# Altium PCB OneWireTC.PcbDoc
Units mil, origin at the board's own origin, x right, y up, seen from the top; angles counter-clockwise.
Board outline 21889.76 x 818.11 mil, 2 copper layers (Top Layer, Bottom Layer); 57 components, 37 nets, 268 pads, 163 vias.
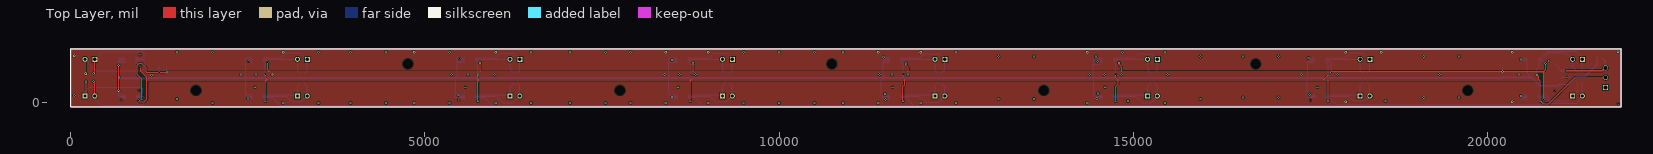
[diagram p0: Top Layer view]
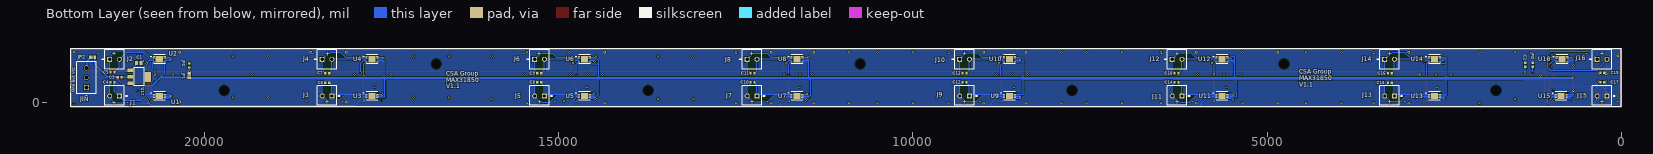
[diagram p1: Bottom Layer view, seen from below]

## Layer stack, top to bottom
Top Solder: solder mask 0.4, Solder Resist, Dk 3.5
Top Layer: signal copper 1.4
Dielectric 1: dielectric 12.6, FR-4, Dk 4.8
Bottom Layer: signal copper 1.4
Bottom Solder: solder mask 0.4, Solder Resist, Dk 3.5

## Board outline
0,-59.06 21889.76,-59.06 21889.76,759.06 0,759.06

## Design rules (kind name [scope] priority, off if disabled: settings)
Clearance [All] p1: gap=10 ignorepadtopadclearanceinfootprint=FALSE except(0: Arc-Hole Track-Hole SMDPad-Hole THPad-Hole Via-Hole Fill-Hole Poly-Hole Region-Hole Text-Hole; 8: Arc-Arc Arc-Track Arc-SMDPad Arc-Via Track-Track Track-SMDPad Track-Via SMDPad-SMDPad)
PolygonConnect [All] p1: connectstyle=Relief reliefconductorwidth=10 reliefentries=4 polygonreliefangle="90 Angle" airgapwidth=10
RoutingVias [All] p1: holewidth=28 width=50 viastyle="Through Hole" minholewidth=10 minwidth=25 maxholewidth=28 maxwidth=50
SolderMaskExpansion [All] p1: expansion=4 istentingtop=FALSE
Width [All] p1: maxlimit=40 minlimit=10 preferedwidth=10 minimp=50.000000 maximp=50.000000 favimp=50.000000
30 further rules are at their usual default settings.

## Classes and differential pairs
component class Sheet2: C12 C13 C14 C15 C16 C17 C18 C19 J9 J10 J11 J12 J13 J14 J15 J16 U9 U10 U11 U12 U13 U14 U15 U16
component class Sheet1: C1 C2 C3 C4 C5 C6 C7 C8 C9 C10 C11 J1 J2 J3 J4 J5 J6 J7 J8 JIN JP0 JP1 JP2 JPO U1 U2 U3 U4 U5 U6 U7 U8 U17

## Components (designator, comment, footprint, x,y, rotation, side; value= is the part's Value field where it differs from the comment)
C1 "" C0805 20929.13,559.06 r0 bottom value=4.7uF
C2 "" 1608[0603] 1358.27,531.5 r270 bottom value=0.1uF
C3 "" 1608[0603] 21198.06,353.15 r0 bottom value=1uF
C4 "" 1608[0603] 21299.21,285.43 r0 bottom value=0.1uF
C5 "" 1608[0603] 21299.21,423.23 r180 bottom value=0.1uF
C6 "" 1608[0603] 18267.72,279.53 r0 bottom value=0.1uF
C7 "" 1608[0603] 18267.72,413.39 r180 bottom value=0.1uF
C8 "" 1608[0603] 15275.59,283.46 r0 bottom value=0.1uF
C9 "" 1608[0603] 15275.59,413.39 r180 bottom value=0.1uF
C10 "" 1608[0603] 12263.78,283.46 r0 bottom value=0.1uF
C11 "" 1608[0603] 12263.78,413.39 r180 bottom value=0.1uF
C12 "" 1608[0603] 9271.65,283.46 r0 bottom value=0.1uF
C13 "" 1608[0603] 9271.65,413.39 r180 bottom value=0.1uF
C14 "" 1608[0603] 6279.53,283.46 r0 bottom value=0.1uF
C15 "" 1608[0603] 3267.72,275.59 r0 bottom value=0.1uF
C16 "" 1608[0603] 3267.72,413.39 r180 bottom value=0.1uF
C17 "" 1608[0603] 267.72,283.46 r0 bottom value=0.1uF
C18 "" 1608[0603] 6279.53,413.39 r180 bottom value=0.1uF
C19 "" 1608[0603] 267.72,417.32 r180 bottom value=0.1uF
J1 "1776275-2" TE_1776275-2 21202.2,90.94 r0 bottom
J2 "1776275-2" TE_1776275-2 21339.8,609.05 r180 bottom
J3 "1776275-2" TE_1776275-2 18202.2,90.94 r0 bottom
J4 "1776275-2" TE_1776275-2 18339.8,609.05 r180 bottom
J5 "1776275-2" TE_1776275-2 15202.2,90.94 r0 bottom
J6 "1776275-2" TE_1776275-2 15339.8,609.05 r180 bottom
J7 "1776275-2" TE_1776275-2 12202.2,90.94 r0 bottom
J8 "1776275-2" TE_1776275-2 12339.8,609.05 r180 bottom
J9 "1776275-2" TE_1776275-2 9202.2,90.94 r0 bottom
J10 "1776275-2" TE_1776275-2 9339.8,609.05 r180 bottom
J11 "1776275-2" TE_1776275-2 6202.2,90.94 r0 bottom
J12 "1776275-2" TE_1776275-2 6339.8,609.05 r180 bottom
J13 "1776275-2" TE_1776275-2 3202.2,90.94 r0 bottom
J14 "1776275-2" TE_1776275-2 3339.8,609.05 r180 bottom
J15 "1776275-2" TE_1776275-2 202.2,90.94 r0 bottom
J16 "1776275-2" TE_1776275-2 339.8,609.05 r180 bottom
JIN "1776275-3" TE_1776275-3 21667.67,212.2 r90 bottom
JP0 "JPX" 1608[0603] 20213.81,522.44 r270 bottom
JP1 "JPY" 6-0805_L 20213.81,380.71 r270 bottom
JP2 "Jumper" 6-0805_L 21581.89,636.61 r0 bottom
JPO "JPX" 1608[0603] 1250,531.5 r270 bottom
U1 "MAX31850JATB" SON50P300X400X80-11N 20637.8,90.94 r180 bottom
U2 "MAX31850JATB" SON50P300X400X80-11N 20637.8,609.05 r180 bottom
U3 "MAX31850JATB" SON50P300X400X80-11N 17637.8,90.94 r180 bottom
U4 "MAX31850JATB" SON50P300X400X80-11N 17637.8,609.05 r180 bottom
U5 "MAX31850JATB" SON50P300X400X80-11N 14637.8,90.94 r180 bottom
U6 "MAX31850JATB" SON50P300X400X80-11N 14637.8,609.05 r180 bottom
U7 "MAX31850JATB" SON50P300X400X80-11N 11637.8,90.94 r180 bottom
U8 "MAX31850JATB" SON50P300X400X80-11N 11637.8,609.05 r180 bottom
U9 "MAX31850JATB" SON50P300X400X80-11N 8637.8,90.94 r180 bottom
U10 "MAX31850JATB" SON50P300X400X80-11N 8637.8,609.05 r180 bottom
U11 "MAX31850JATB" SON50P300X400X80-11N 5637.8,90.94 r180 bottom
U12 "MAX31850JATB" SON50P300X400X80-11N 5637.8,609.05 r180 bottom
U13 "MAX31850JATB" SON50P300X400X80-11N 2637.8,90.94 r180 bottom
U14 "MAX31850JATB" SON50P300X400X80-11N 2637.8,609.05 r180 bottom
U15 "MAX31850JATB" SON50P300X400X80-11N 850,90.94 r180 bottom
U16 "MAX31850JATB" SON50P300X400X80-11N 837.8,609.05 r180 bottom
U17 "MCP1799-3302H/DB" SOT230P700X180-4N 20923.42,361.54 r270 bottom

## Footprints (in the part's own frame and the unit in brackets; to place one, negate y for a bottom-side part, rotate by r counter-clockwise, add the part's x,y. Pads: shape width x height; smd on the part's side, far side on the other; paste and mask are expansions set on the pad)
6-0805_L [mm] "Chip Resistor, Body 2.0x1.2mm, IPC High Density"
  rect 1x1.3 smd: 1(-0.8,0) 2(0.8,0)
  silkscreen extent 0,-0.55 0,0.55, body extent -1.07,-0.7 1.07,0.7, height 0.7
1608[0603] [mm] "Chip Capacitor, Body 1.6x0.8mm, IPC High Density"
  rect 0.8x0.9 smd: 1(-0.7,0) 2(0.7,0)
  body extent -0.87,-0.48 0.87,0.48, height 1.3
C0805 [mm] "Chip Capacitor, Body 2.0x1.3mm, IPC High Density"
  rect 1.1x1.4 smd: 1(-0.75,0) 2(0.75,0)
  body extent -1.1,-0.72 1.1,0.72, height 1.4
SON50P300X400X80-11N [mm]
  rrect25% 0.86x0.27 smd: 1(-1.935,1) 2(-1.935,0.5) 3(-1.935,0) 4(-1.935,-0.5) 5(-1.935,-1) 6(1.935,-1) 7(1.935,-0.5) 8(1.935,0) 9(1.935,0.5) 10(1.935,1)
  rect 2.6x2.3 smd paste-2: 11(0,0)
  silkscreen extent -3.1,-1.55 2.05,1.55
SOT230P700X180-4N [mil]
  rect 48x88 smd: 1(-91,-122) 2(0,-122) 3(91,-122)
  rect 141.73x86.61 smd: 4(0,122.01)
  silkscreen extent -129,-70 129,70
TE_1776275-2 [mm]
  rect 1.8x1.8 hole 1.2: 1(0,0)
  round 1.8 hole 1.2: 2(3.5,0)
  silkscreen extent -2.74,-3.6 5.25,3.4, body extent -2.29,-3.39 5.71,3.61, height 8.5
TE_1776275-3 [mm]
  rect 1.75x1.75 hole 1.4: 1(0,0)
  round 1.75 hole 1.4: 2(3.5,0) 3(7,0)
  silkscreen extent -3,-3.6 9.25,3.4, body extent -2.19,-3.36 9.31,3.64, height 8.4

## Part data
C1 C2 C3 C4 C5 C6 C7 C8 C9 C10 C11 C12 C13 C14 C15 C16 C17 C18 C19: library part "Cap Semi", "Capacitor (Semiconductor SIM Model)", LatestRevisionDate=29-May-2009, LatestRevisionNote="IPC-7351 Footprint Added.", PackageDescription="Chip Capacitor", PackageReference=C1206, Published=8-Jun-2000, Publisher="Altium Limited"
J1 J2 J3 J4 J5 J6 J7 J8 J9 J10 J11 J12 J13 J14 J15 J16: "TERM BLOCK 2POS SIDE ENT 3.5MM", Package=None, Availability=Unavailable, MF="{'manufacturer': u'TE Connectivity'}", MP=1776275-2, Price=None
JIN: Package=None, Availability=Unavailable, MF="{'manufacturer': u'TE Connectivity'}", MP=1776275-3, Price=None
JP0 JP1 JPO: library part Jumper, "Jumper Wire", LatestRevisionDate=17-Jul-2002, LatestRevisionNote="Re-released for DXP Platform.", PackageDescription="Radial Cap, Thru-Hole; 2 Leads; 0.2 in Pin Spacing", PackageReference=RAD-0.2, Published=24-Mar-1999, Publisher="Altium Limited"
JP2: "Jumper Wire", LatestRevisionDate=17-Jul-2002, LatestRevisionNote="Re-released for DXP Platform.", PackageDescription="Radial Cap, Thru-Hole; 2 Leads; 0.2 in Pin Spacing", PackageReference=RAD-0.2, Published=24-Mar-1999, Publisher="Altium Limited"
U1 U2 U3 U4 U5 U6 U7 U8 U9 U10 U11 U12 U13 U14 U15 U16: "None", Availability=Unavailable, MF="{'manufacturer': u'Maxim Integrated'}", MP=MAX31850JATB, Package=None, Price=None
U17: library part AP2114H-3.3TRG1, Package=None, Availability=Unavailable, MF="{'manufacturer': u'Diodes Inc.'}", MP=AP2114H-3.3TRG1, Price=None

## Free pads (board coordinates)
  round 0 hole 137.8: 2(1768.9,169.68) 2(4761.02,543.7) 2(7753.15,169.68) 2(10745.28,543.7) 2(13737.4,169.68) 2(16729.53,543.7) 2(19721.65,169.68)

## Via types
v1: diameter 30, hole 15.75, Top Layer to Bottom Layer, tented both sides, 118 vias
v2: diameter 25, hole 15.75, Top Layer to Bottom Layer, tented both sides, 45 vias

## Nets (pads, with @x,y where several pads share a name; then routed paths per layer and width w, separated by ;. In a path a pad name is that pad's centre, name@x,y a point inside that pad or via, vN(x,y) a via of type N, cw(c..) or ccw(c..) an arc to the next point about the centre after c; other vN are vias at no path point)
BUS: JIN.2 U1.5 U2.5 U3.5 U4.5 U5.5 U6.5 U7.5 U8.5 U9.5 U10.5 U11.5 U12.5 U13.5 U14.5 U15.5 U16.5 | length 25863.5
  Top Layer w10: v2(989.4,502.76) 989.4,439.35 1075.61,353.15 ; v2(5749.24,396.02) 5749.24,337.4 5768.93,317.72 ; v2(8749.24,18.09) 8749.24,298.03 8768.93,317.72 ; v2(14749.24,18.09) 14749.24,223.23 14784.68,258.66 14784.68,317.72
  Top Layer w12: v2(959.87,28.35) 981.53,6.69 1040.58,6.69 1075.61,41.72 1075.61,317.72 1075.61,353.15
  Top Layer w14: 1075.61,317.72 2776.8,317.72 ; v2(2749.24,18.09) 2749.24,290.16 2776.8,317.72 ; v2(2749.24,392.52) 2749.24,345.28 2776.8,317.72 ; v2(5749.24,18.09) 5749.24,298.03 5768.93,317.72 ; v2(8759.84,383.86) 8759.84,326.8 8768.93,317.72 ; v2(11749.24,18.09) 11749.24,227.17 11771.65,249.57 11771.65,314.96 ; v2(11753.18,392.52) 11753.18,345.28 11776.2,322.26 11780.74,317.72 ; v2(14753.18,392.52) 14753.18,349.21 14784.68,317.72 ; v2(17749.24,18.09) 17751.35,20.2 17751.35,27.98 17751.97,28.6 17751.97,317.72 ; v2(17755.9,384.8) 17749.4,384.8 17682.31,317.72 ; 20725.62,317.72 17751.97,317.72 ; 2776.8,317.72 5768.93,317.72 ; 5768.93,317.72 8768.93,317.72 ; 8768.93,317.72 11771.65,317.72 11780.74,317.72 ; 11780.74,317.72 14784.68,317.72 ; 14784.68,317.72 17682.31,317.72 ; 17682.31,317.72 17751.97,317.72
  Top Layer w16: v2(20698.82,387.83) 20725.62,361.02 20725.62,317.72 20748.03,295.31 20748.03,19.31 v2(20749.24,18.09) 20784.27,-16.93 20866.99,-16.93 21233.92,350 JIN.2
  Bottom Layer w10: U16.5 925.59,569.68 925.91,569.37 925.91,566.25 v2(989.4,502.76) ; U15.5 937.8,51.57 959.87,29.5 v2(959.87,28.35) ; U13.5@2724.8,50 v2@2749.24,25.56 ; U14.5@2724.8,569.68 2749.24,545.24 v2(2749.24,392.52) ; U11.5@5724.8,50 v2@5749.24,25.56 ; U12.5@5724.8,565.75 5749.24,541.31 v2(5749.24,396.02) v2@5749.24,393.7 ; U10.5@8720.87,565.75 8759.84,526.77 v2(8759.84,383.86) ; U9.5@8724.8,50 v2@8749.24,25.56 ; U7.5@11724.8,50 v2@11749.24,25.56 ; U8.5@11724.8,565.75 11753.18,537.37 v2(11753.18,392.52) ; U5.5@14724.8,50 v2@14749.24,25.56 ; U6.5@14724.8,569.68 14753.18,541.31 v2(14753.18,392.52) ; U4.5 17725.59,569.68 17755.9,539.37 v2(17755.9,384.8) ; U3.5@17724.8,50 v2@17749.24,25.56 ; v2(20698.82,387.83) 20698.82,466.54 20729.46,497.18 20729.46,568.96 U2.5@20728.74,569.68 ; U1.5@20724.8,50 v2@20749.24,25.56
GND: C1.1 C2.1 C3.1 JIN.1 JP0.1 JPO.1 U1.1 U1.6 U1.7 U1.8 U1.9 U1.11 U2.1 U2.7 U2.8 U2.9 U2.11 U3.1 U3.6 U3.8 U3.9 U3.11 U4.1 U4.8 U4.9 U4.11 U5.1 U5.6 U5.7 U5.9 U5.11 U6.1 U6.7 U6.9 U6.11 U7.1 U7.6 U7.9 U7.11 U8.1 U8.9 U8.11 U9.1 U9.6 U9.7 U9.8 U9.11 U10.1 U10.7 U10.8 U10.11 U11.1 U11.6 U11.8 U11.11 U12.1 U12.8 U12.11 U13.1 U13.6 U13.7 U13.11 U14.1 U14.7 U14.11 U15.1 U15.6 U15.11 U16.1 U16.11 U17.2 | length 2770.9
  Bottom Layer w10: v2@715,45.94 722.56,45.94 728.19,51.57 U15.6 ; v2(2509,580.06) 2518.31,589.37 U14.7 ; U13.6 2512.43,51.57 2507.06,56.94 v2(2503,56.94) 2510,56.94 2524.31,71.26 U13.7 ; v2(5475,104.94) 5478,104.94 5492,90.94 U11.8 ; v2(5478,35.94) 5493.63,51.57 U11.6 ; v2(5489,617.05) 5496,617.05 5504,609.05 U12.8 ; v1@8477,73.44 8479.6,73.44 8482.59,76.43 8482.59,79.04 8494.5,90.94 U9.8 ; U9.6 8489.86,51.57 8478.82,62.61 8478.82,70.9 8479.18,71.26 U9.7 ; U10.7 8502.78,589.37 8492.1,600.05 8487,600.05 8487,602.05 8494,609.05 U10.8 ; v1@11476,638.05 11485.32,628.74 U8.9 ; v1@11493,120.94 11503.32,110.63 U7.9 ; v1@11505,43.94 11508.67,47.61 11546.04,47.61 11550,51.57 U7.6 ; v1@14475,647.05 14493.32,628.74 U6.9 ; v1@14493,579.06 14503.32,589.37 U6.7 ; v1@14502,124.94 14516.32,110.63 U5.9 ; U5.6 14495.78,51.57 14490.41,56.94 v1(14485,56.94) 14499.32,71.26 U5.7 ; v1@17475,633.74 v1(17475,628.58) ; v1@17488.39,115.32 v1(17488.39,110.16) ; U4.8@17561.54,608.98 17489.54,608.98 17475,623.52 v1(17475,628.58) ; U4.9 17475.16,628.74 v1(17475,628.58) ; U3.8@17574.92,90.55 17502.92,90.55 17488.39,105.09 v1(17488.39,110.16) ; U3.9@17575,110.32 17488.54,110.32 v1(17488.39,110.16) ; U1.9@20561.3,110.94 20490,110.94 20475,95.94 v1(20475,90.79) ; U1.7@20561.54,71.18 20489.54,71.18 v1@20478.83,81.9 ; U1.6 20490.86,51.57 20478.83,63.61 v1@20478.83,81.9 ; U1.8 20475.16,90.94 v1(20475,90.79) ; U2.7 20561.54,589.29 20489.54,589.29 20475,603.83 v1(20475,608.9) ; U2.8 20475.16,609.05 v1(20475,608.9) ; U2.9 20561.3,629.05 20490,629.05 20475,614.05 v1(20475,608.9) ; v2(20866.14,586.61) 20869.01,583.74 20874.92,583.74 20877.05,581.61 20882.95,581.61 20899.61,564.96 C1.1 ; C3.1@21164.09,357.6 C3.1@21168.54,353.15 ; v1(20475,90.79) 20478.83,86.96 v1@20478.83,81.9
  Bottom Layer w22: U17.2@21045.42,357.6 C3.1@21164.09,357.6
  other v1: 2000,-9.06 3000,-9.06 3500,-9.06 3950,-9.06 4450,-9.06 4850,-9.06 5350,-9.06 6000,-9.06 6500,-9.06 7050,-9.06 7550,-9.06 7900,-9.06 8400,-9.06 9000,-9.06 9500,-9.06 10000,-9.06 10500,-9.06 10900,-9.06 11400,-9.06 12000,-9.06 12500,-9.06 14350,-9.06 15450,-9.06 18000,10.63 20350,10.63 14926.41,18.5 18562.99,19.68 11504.84,43.79 1500,50 13100,50 13600,50 15950,50 16550,69.68 17050,69.68 19100,69.68 19600,69.68 8488.84,72.79 50,100 11492.84,120.79 14501.84,124.79 1141.73,383.86 2401.57,393.7 2618.11,393.7 2844.49,393.7 5374.02,393.7 5610.24,393.7 5984.25,393.7 8385.83,393.7 8592.52,393.7 8818.9,393.7 11417.32,393.7 11594.49,393.7 11820.87,393.7 14379.92,393.7 14596.46,393.7 14832.68,393.7 15482.28,393.7 17372.05,393.7 17883.86,393.7 19320.87,393.7 20442.91,393.7 14492.84,578.9 11475.84,637.9 14474.84,646.9 13100,650 13600,650 15950,650 16550,650 17050,650 19100,650 19600,650 50,659.05 1500,709.05 2000,709.05 3000,709.05 3500,709.05 3950,709.05 4450,709.05 4850,709.05 5350,709.05 6000,709.05 6500,709.05 7050,709.05 7550,709.05 7900,709.05 8400,709.05 9000,709.05 9500,709.05 10000,709.05 10500,709.05 10900,709.05 11400,709.05 12000,709.05 12500,709.05 14350,709.05 14850,709.05 15450,709.05 18000,709.05 18500,709.05 20350,709.05 21842.52,716.54
  other v2: 21846.46,-15.75 17500,30.94 713,37.94 20948.82,165.35 960,170.94 2600,215.94 5575,215.94 8575,215.94 11600,215.94 14600,215.94 17600,215.94 21119.32,357.09 8486.84,599.9 980,674.05
NetC4_1: C4.1 J1.1 U1.2 | length 775.5
  Bottom Layer w10: U1.2 20814.6,110.63 20902.79,22.44 21131.5,22.44 21169.57,60.51 21171.77,60.51 21200,88.74 J1.1@21200,90.94 ; J1.1 21271.65,160.39 C4.1
NetC4_2: C4.2 J1.2 U1.3 | length 922.6
  Bottom Layer w10: U1.3 20794.91,90.94 20894.91,-9.06 21265,-9.06 21326.15,52.09 21326.15,79.3 J1.2@21337.8,90.94 ; C4.2 21337.52,274.68 21337.52,93.43 J1.2
NetC5_1: C5.1 J2.1 U2.2 | length 921.5
  Bottom Layer w10: U2.2 20753.18,628.74 20847.67,723.23 21255.83,723.23 21330,649.05 21331.94,649.05 21331.94,614.91 J2.1@21337.8,609.05 ; C5.1 21326.77,425.2 21339.8,438.22 J2.1
NetC5_2: C5.2 J2.2 U2.3 | length 779
  Bottom Layer w10: U2.3 20772.87,609.05 20867.35,703.54 21105.51,703.54 J2.2@21200,609.05 ; J2.2 21202,494.85 21271.65,425.2 C5.2
NetC6_1: C6.1 J3.1 U3.2 | length 698.5
  Bottom Layer w10: U3.2 18180.32,110.63 J3.1@18200,90.94 ; J3.1 18202.2,239.61 18240.16,277.56 C6.1
NetC6_2: C6.2 J3.2 U3.3 | length 881.2
  Bottom Layer w10: U3.3 18035,90.94 18095.63,30.32 18277.17,30.32 J3.2@18337.8,90.94 ; C6.2 18295.28,277.56 18340,232.83 J3.2
NetC7_1: C7.1 J4.1 U4.2 | length 904.3
  Bottom Layer w10: U4.2 17999.69,628.74 18070,699.05 18247.8,699.05 J4.1@18337.8,609.05 ; C7.1 18295.28,415.35 18339.8,459.87 J4.1
NetC7_2: C7.2 J4.2 U4.3 | length 697.5
  Bottom Layer w10: U4.3 J4.2@18200,609.05 ; J4.2 18202,453.51 18240.16,415.35 C7.2
NetC8_1: C8.1 J5.1 U5.2 | length 705.7
  Bottom Layer w10: U5.2 15180.32,110.63 J5.1@15200,90.94 ; J5.1 15202.2,235.67 15248.03,281.5 C8.1
NetC8_2: C8.2 J5.2 U5.3 | length 917.5
  Bottom Layer w10: U5.3 15030,90.94 15125,-4.06 15255,-4.06 15337.8,78.74 J5.2@15337.8,90.94 ; C8.2 15303.15,281.5 15340,244.65 J5.2
NetC9_1: C9.1 J6.1 U6.2 | length 892.8
  Bottom Layer w10: U6.2 15019.68,628.74 15080,689.05 15257.8,689.05 J6.1@15337.8,609.05 ; C9.1 15303.15,415.35 15339.8,452 J6.1
NetC9_2: C9.2 J6.2 U6.3 | length 700.8
  Bottom Layer w10: U6.3 J6.2@15200,609.05 ; J6.2 15202,461.39 15248.03,415.35 C9.2
NetC10_1: C10.1 J7.1 U7.2 | length 692.9
  Bottom Layer w10: U7.2 12180.32,110.63 J7.1@12200,90.94 ; J7.1 12202.2,239.61 12236.22,273.62 C10.1@12236.22,275.59
NetC10_2: C10.2 J7.2 U7.3 | length 899
  Bottom Layer w10: U7.3 11970,90.94 12055,5.94 12252.8,5.94 J7.2@12337.8,90.94 ; C10.2@12291.34,275.59 12291.34,273.62 12340,224.96 J7.2
NetC11_1: C11.1 J8.1 U8.2 | length 897.7
  Bottom Layer w10: U8.2 11989.68,628.74 12050,689.05 12257.8,689.05 J8.1@12337.8,609.05 ; C11.1 12291.34,415.35 12339.8,463.81 J8.1
NetC11_2: C11.2 J8.2 U8.3 | length 695.9
  Bottom Layer w10: U8.3 J8.2@12200,609.05 ; J8.2 12202,447.61 C11.2
NetC12_1: C12.1 J9.1 U9.2 | length 704
  Bottom Layer w10: U9.2 9180.32,110.63 J9.1@9200,90.94 ; J9.1 9202.2,239.61 9244.09,281.5 C12.1
NetC12_2: C12.2 J9.2 U9.3 | length 899.5
  Bottom Layer w10: U9.3 9025,90.94 9105,10.94 9257.8,10.94 J9.2@9337.8,90.94 ; C12.2 9299.21,281.5 9340,240.71 J9.2
NetC13_1: C13.1 J10.1 U10.2 | length 898.6
  Bottom Layer w10: U10.2 9014.68,628.74 9080,694.05 9252.8,694.05 J10.1@9337.8,609.05 ; C13.1 9299.21,415.35 9339.8,455.94 J10.1
NetC13_2: C13.2 J10.2 U10.3 | length 699.1
  Bottom Layer w10: U10.3 J10.2@9200,609.05 ; J10.2 9202,457.45 9244.09,415.35 C13.2
NetC14_1: C14.1 J11.1 U11.2 | length 699.4
  Bottom Layer w10: U11.2 6180.31,110.63 J11.1@6200,90.94 ; J11.1 6202.2,223.86 6251.97,273.62 C14.1@6251.97,275.59
NetC14_2: C14.2 J11.2 U11.3 | length 900.8
  Bottom Layer w10: U11.3 6010,90.94 6105,-4.06 6242.8,-4.06 J11.2@6337.8,90.94 ; C14.2@6307.09,275.59 6340,242.68 J11.2
NetC15_1: C15.1 J13.1 U13.2 | length 694.5
  Bottom Layer w10: U13.2 3180.31,110.63 J13.1@3200,90.94 ; J13.1 3202.2,235.67 3240.16,273.62 C15.1
NetC15_2: C15.2 J13.2 U13.3 | length 893.3
  Bottom Layer w10: U13.3 3040,90.94 3120,10.94 3257.8,10.94 J13.2@3337.8,90.94 ; C15.2 3295.28,273.62 3340,228.9 J13.2
NetC16_1: C16.1 J14.1 U14.2 | length 908.5
  Bottom Layer w10: U14.2 2979.69,628.74 3055,704.05 3242.8,704.05 J14.1@3337.8,609.05 ; C16.1 3295.28,415.35 3339.8,459.87 J14.1
NetC16_2: C16.2 J14.2 U14.3 | length 697.5
  Bottom Layer w10: U14.3 J14.2@3200,609.05 ; J14.2 3202,453.51 3240.16,415.35 C16.2
NetC17_1: C17.1 J15.1 U15.2 | length 1276.9
  Top Layer w10: J15.1 216.54,105.28 v1(216.54,295.28)
  Bottom Layer w10: J15.1@200,90.94 200,150.94 265,215.94 990,215.94 1015,190.95 1015,135.94 989.68,110.63 U15.2
NetC17_2: C17.2 J15.2 U15.3 | length 1196.1
  Top Layer w10: v1(322.83,295.28) 322.83,289.86 340,272.7 J15.2
  Bottom Layer w10: J15.2@337.8,90.94 349.44,79.3 349.44,41.5 431.5,-40.55 999.24,-40.55 1038.61,-1.18 1038.61,67.72 1015.39,90.94 U15.3
NetC18_1: C18.1 J12.1 U12.2 | length 895.3
  Bottom Layer w10: U12.2 5999.68,628.74 6065,694.05 6252.8,694.05 J12.1@6337.8,609.05 ; C18.1 6307.09,415.35 6339.8,448.06 J12.1
NetC18_2: C18.2 J12.2 U12.3 | length 702.4
  Bottom Layer w10: U12.3 J12.2@6200,609.05 ; J12.2 6202,465.32 6251.97,415.35 C18.2
NetC19_1: C19.1 J16.1 U16.2 | length 1134
  Top Layer w10: v1(322.83,405.51) 322.83,410.92 339.8,427.88 J16.1
  Bottom Layer w10: J16.1@337.8,609.05 442.8,714.05 1015,714.05 1035,694.06 1035,649.05 1014.68,628.74 U16.2
NetC19_2: C19.2 J16.2 U16.3 | length 1360.7
  Top Layer w10: J16.2 208.77,602.28 208.77,409.34 v1(212.6,405.51)
  Bottom Layer w10: J16.2@200,609.05 360.24,448.82 1003.94,448.82 1035,479.88 1035,589.06 1015,609.05 U16.3
Vchip: C2.2 JP0.2 JP1.1 JPO.2 U1.4 U2.4 U3.4 U4.4 U5.4 U6.4 U7.4 U8.4 U9.4 U10.4 U11.4 U12.4 U13.4 U14.4 U15.4 U16.4 | length 42298.7
  Top Layer w10: v2(1001.21,46.06) 1001.21,329.53 938.22,392.52 938.22,522.44 965.78,550 1001.21,550 ; v2(2780.74,561.81) 2780.74,463.39 2811.06,433.07 ; v1(5780,559.06) 5780,444.44 5791.37,433.07 ; 8785,431.57 8785,433.07 v1(8785,554.06) ; v1(11790,549.06) 11791.15,547.9 11791.15,527.78 11826.8,492.13 11826.8,433.07 ; v1(14800,559.06) 14801.68,557.37 14801.68,529.06 14838.61,492.13 14838.61,433.07
  Top Layer w14: 20787.4,433.07 20792.55,438.22 20820,465.67 v1(20820,549.06)
  Top Layer w15: v2(1009.09,538.19) 1064.99,482.28 1064.99,423.23 v2(1250,423.23) v2(1358.27,423.23) 1360.97,423.23 1370.82,433.07 2809.48,433.07 ; 2811.06,433.07 5791.37,433.07 8785,433.07 11826.8,433.07 14838.61,433.07 ; 17784.73,433.07 17793.78,424.02 v2(17796.49,424.02) 17799.19,424.02 17808.25,433.07 ; v2@20203.98,433.07 20204.83,433.91 20211.9,433.91 v2(20213.81,435.83) v2@20216.87,432.77
  Top Layer w16: 14838.61,433.07 17784.73,433.07 ; 20792.55,433.07 20792.55,438.22 20792.55,439.76
  Top Layer w18: 17808.25,433.07 v2@20203.98,433.07 ; v2(20792.55,38.19) 20792.55,432.77 20792.55,433.07
  Top Layer w20: v2@20216.87,432.77 20792.55,432.77
  Bottom Layer w10: U16.4 957.91,589.37 v2(1009.09,538.19) ; U15.4 976.02,71.26 v2(1001.21,46.06) ; v2(1250,423.23) JPO.2 ; v2(1358.27,423.23) C2.2 ; U13.4 2846.09,71.26 2957.91,-40.55 ; U14.4 2757.12,589.37 v2@2781.06,565.43 ; U11.4 5838.22,71.26 5950.03,-40.55 ; U12.4 5749.68,589.37 v1(5780,559.06) ; U9.4 8810.66,71.26 8922.47,-40.55 ; U10.4 8749.68,589.37 v1(8785,554.06) ; U7.4 11783.1,71.26 11894.91,-40.55 ; U8.4 11749.68,589.37 v1(11790,549.06) ; U5.4 14714.29,70.94 14755.86,70.94 14867.35,-40.55 ; U6.4 14769.68,589.37 v1(14800,559.06) ; U3.4 17759.48,71.26 17871.29,-40.55 ; U4.4 17759.69,589.37 17797.2,551.86 17797.2,424.73 v2(17796.49,424.02) ; v2(20213.81,435.83) JP0.2 ; U1.4 20759.48,71.26 v2(20792.55,38.19) ; U2.4 20779.69,589.37 v1(20820,549.06)
  Bottom Layer w12: 2957.91,-40.55 5950.03,-40.55
  Bottom Layer w14: 5950.03,-40.55 8922.47,-40.55 11894.91,-40.55 14867.35,-40.55
  Bottom Layer w16: 14867.35,-40.55 17871.29,-40.55
  Bottom Layer w18: 17871.29,-40.55 20753.18,-40.55 20792.55,-1.18 v2(20792.55,38.19)
VDD: C3.2 JP1.2 JP2.1 U2.6 U3.7 U4.6 U4.7 U5.8 U6.6 U6.8 U7.7 U7.8 U8.6 U8.7 U8.8 U9.9 U10.6 U10.9 U11.7 U11.9 U12.6 U12.7 U12.9 U13.8 U13.9 U14.6 U14.8 U14.9 U15.7 U15.8 U15.9 U16.6 U16.7 U16.8 U16.9 U17.3 | length 28342.9
  Top Layer w10: v1(675,165.94) v1@677.5,168.44 ; v1(675,524.06) v1@677.5,521.56 ; v1@677.5,347.5 v1(680,350) v1@677.5,352.5
  Top Layer w14: v1@677.5,168.44 677.5,347.5 677.5,350 677.5,352.5 v1@677.5,521.56
  Bottom Layer w10: 675,100.94 685,90.94 ; 675,115.94 680.32,110.63 U15.9 ; v1(675,524.06) 675,564.06 ; U16.6 680.63,569.68 675,564.06 ; U16.7 675.32,589.37 675,589.06 ; U16.8 680,609.05 675,604.05 ; U16.9 684.68,628.74 675,619.05 675,604.05 ; U15.7 704.68,71.26 685,90.94 ; U15.8 685,90.94 ; 2468,108.95 2486,90.94 U13.8 ; 2468,110.63 U13.9 ; 2488,350 2472,366 2472,545.06 ; U14.6 2550,569.68 2525.37,545.06 2472,545.06 ; U14.8 2482,609.05 2472,599.05 ; U14.9 2561.3,629.05 2482,629.05 2472,619.05 2472,599.05 ; 2824.05,349.21 2824.05,350 ; 5432,71.26 U11.7 ; 5434,134.94 5438.5,130.44 5495.5,130.44 5515.31,110.63 U11.9 ; 5475,350 5460,365 5460,569.06 ; U12.6 5460.63,569.68 5460,569.06 ; U12.7 5465.31,589.37 5460,584.06 ; U12.9 5561.3,629.05 5526.91,629.05 5508.91,647.05 5465.86,647.05 5460,641.2 5460,584.06 ; 8445,121.94 8456.32,110.63 U9.9 ; 8461,350 8444,367 8444,563.83 ; U10.6 8449.86,569.68 8444,563.83 ; U10.9 8464.68,628.74 8444,608.05 8444,563.83 ; 11463,72.94 11515.28,72.94 11516.97,71.26 U7.7 ; 11463,90.94 U7.8 ; 11485,350 11470,365 11470,569.06 ; U8.6 11470.63,569.68 11470,569.06 ; U8.7 11473.83,589.37 11470,593.2 ; U8.8 11485.86,609.05 11470,593.2 ; 14440,110.91 14459.96,90.94 U5.8 ; 14442.06,346.06 14446,350 14436,360 14436,528.06 ; 14485,340 14491.06,346.06 14495,350 ; U6.6 14550,569.68 14522.37,542.06 14450,542.06 14436,528.06 ; U6.8 14459,609.05 14436,586.06 14436,528.06 ; 17452.76,70.87 17546.83,70.87 17546.9,70.94 17561.3,70.94 U3.7 ; 17461,359 17461,573.06 ; U4.6 17464.37,569.68 17461,573.06 ; U4.7 17475.32,589.37 17460,574.06 17461,573.06 ; U2.6 20561.61,414.76 20623.25,353.13 ; C3.2@21232.33,348.41 21244.24,360.32 ; JP2.1@21548.46,634.68 JP2.1 ; 675,564.06 675,589.06 ; 675,589.06 675,604.05 ; 2472,545.06 2472,599.05 ; 5460,569.06 5460,584.06 ; 11470,569.06 11470,589.37 11470,593.2
  Bottom Layer w14: 675,100.94 675,115.94 v1(675,165.94) ; 2468,108.95 2468,110.63 2468,342.13 ; 5432,71.26 5432,130.44 ; 5434,134.94 5434,324 5451.34,341.34 ; 5452.13,342.13 5460,350 ; 8445,121.94 8445,324 8461,340 ; 11463,72.94 11463,90.94 11445,108.94 11445,310 11477.52,342.52 11485,350 ; 14440,110.91 14440,344 14440.42,344.42 ; 17452,345 17452,346.06 17452,350 ; 17452.76,70.87 17452.76,329.25 17460.78,337.28 ; 17715,345 17715,350
  Bottom Layer w16: U17.3@21016.96,254.72 21156.3,254.72 21222.47,320.9 21222.47,348.03 C3.2@21227.59,353.15
  Bottom Layer w20: 21244.24,360.32 21370.59,360.32 21548.46,538.19 JP2.1@21548.46,634.68
  Bottom Layer w22: 20740.16,236.22 20996.09,236.22 20997.28,235.04
  Bottom Layer w24: 20623.25,353.13 20740.16,236.22 ; 20997.28,235.04 U17.3@21016.96,254.72
  Bottom Layer w28: 20561.62,353.04 20623.25,353.13
  Bottom Layer w30: v1(680,350) 687.87,342.13 1383.1,342.13 2468,342.13 2477,342.13 2824.05,342.13 ; 2824.05,341.34 5451.34,341.34 5454.57,341.34 ; 5452.13,342.13 5475,342.13 8461,342.13 ; 8461,342.52 11470,342.52 11477.52,342.52 ; 11483.36,344.42 14440.42,344.42 ; 14442.06,346.06 14491.06,346.06 17452,346.06 ; 17452,345 17461,345 17468.5,345 17715,345 20209.6,345 JP1.2 ; JP1.2@20213.81,352.58 20561.62,353.04
Vext: C1.2 JIN.3 JP2.2 U17.1 | length 971
  Top Layer w26: v2(21111.45,447.64) 21627.51,447.64 JIN.3
  Bottom Layer w10: C1.2@20948.06,557.87 20948.06,551.97 21006.42,493.61 21006.42,471.54 U17.1@21029.35,448.6 ; U17.1@21026.91,448.6 U17.1@21029.35,448.6 ; U17.1@21045.42,448.6 U17.1@21029.35,448.6 ; U17.1@21046.49,447.64 21030.32,447.64 U17.1@21029.35,448.6 ; JIN.3@21664.6,490.87 JIN.3
  Bottom Layer w20: JP2.2@21621.29,622.81 21664.6,579.5 JIN.3@21664.6,490.87
  Bottom Layer w30: U17.1@21046.49,447.64 v2(21111.45,447.64)
pads on no net: U1.10 U2.10 U3.10 U4.10 U5.10 U6.10 U7.10 U8.10 U9.10 U10.10 U11.10 U12.10 U13.10 U14.10 U15.10 U16.10 U17.4

## Polygon pours and split planes (outlines as drawn)
GND on Top Layer "GND_L01_P001" (solid, remove dead copper, pour order 1): 21889.22,760.32 21889.22,-59.06 0,-59.06 0,760.32
GND on Bottom Layer "GND_L02_P000" (solid, remove dead copper, pour order 0): 21889.76,759.06 21889.76,-59.06 0,-59.06 0,759.06

## Keep-outs
Keep-Out Layer:
  the board outline again, w10

## Silkscreen, mask and mechanical layers (free items; w line width, h text height)
Top Overlay:
  the board outline again, w10
Bottom Overlay:
  the board outline again, w10
  text "CSA Group / MAX31850 / V1.1" at 4549.8,225 h60
  text "CSA Group / MAX31850 / V1.1" at 16586.79,197.04 h60
  text "Gnd Bus Vcc" at 21829.87,146.8 h40 r270

## Text inside footprints (layer, text, board x,y; h text height)
J1: Bottom Overlay "-     +" at 21070.27,16.38 h60 r180
J2: Bottom Overlay "-      +" at 21504.8,669.05 h60
J3: Bottom Overlay "-      +" at 18037.2,30.94 h60 r180
J4: Bottom Overlay "-      +" at 18493.94,659.61 h60
J5: Bottom Overlay "-      +" at 15037.2,30.94 h60 r180
J6: Bottom Overlay "-      +" at 15504.8,669.05 h60
J7: Bottom Overlay "-      +" at 12037.2,30.94 h60 r180
J8: Bottom Overlay "-      +" at 12504.8,669.05 h60
J9: Bottom Overlay "-      +" at 9037.2,30.94 h60 r180
J10: Bottom Overlay "-      +" at 9504.8,669.05 h60
J11: Bottom Overlay "-      +" at 6037.2,30.94 h60 r180
J12: Bottom Overlay "-      +" at 6504.8,669.05 h60
J13: Bottom Overlay "-      +" at 3037.2,30.94 h60 r180
J14: Bottom Overlay "-      +" at 3504.8,669.05 h60
J15: Bottom Overlay "-      +" at 37.2,30.94 h60 r180
J16: Bottom Overlay "-      +" at 504.8,669.05 h60